# EAGLE board zx81_kbd v0.3 (EAGLE 9.6.2)
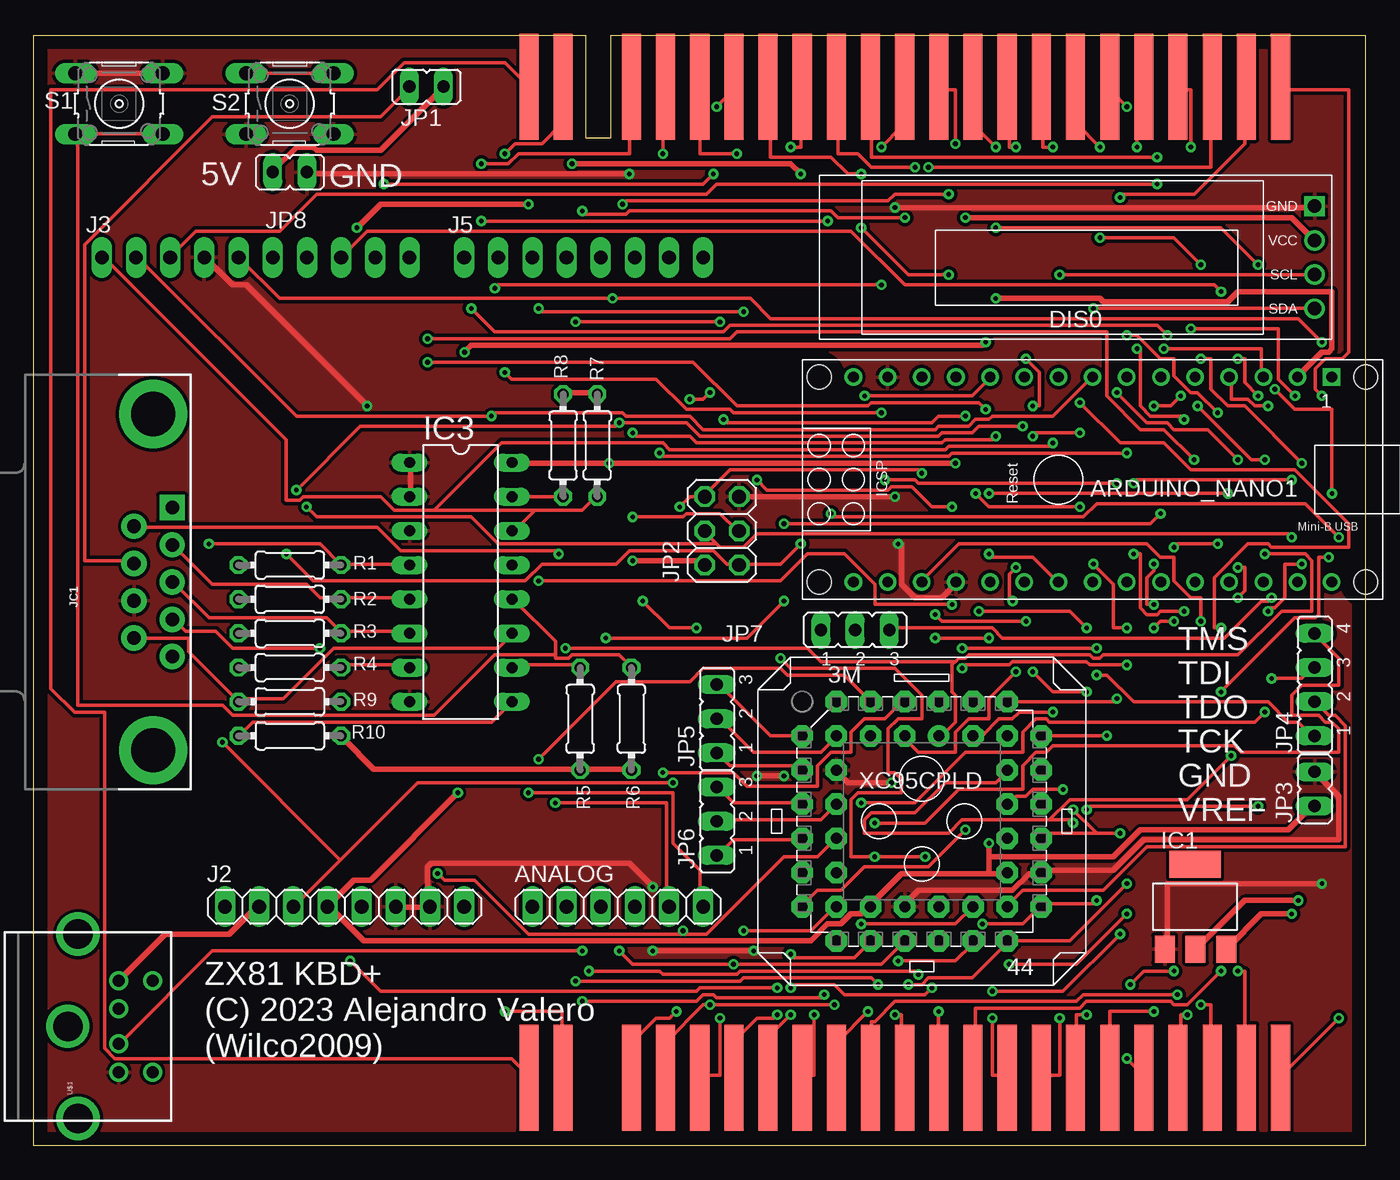
[diagram p0: board, top side]
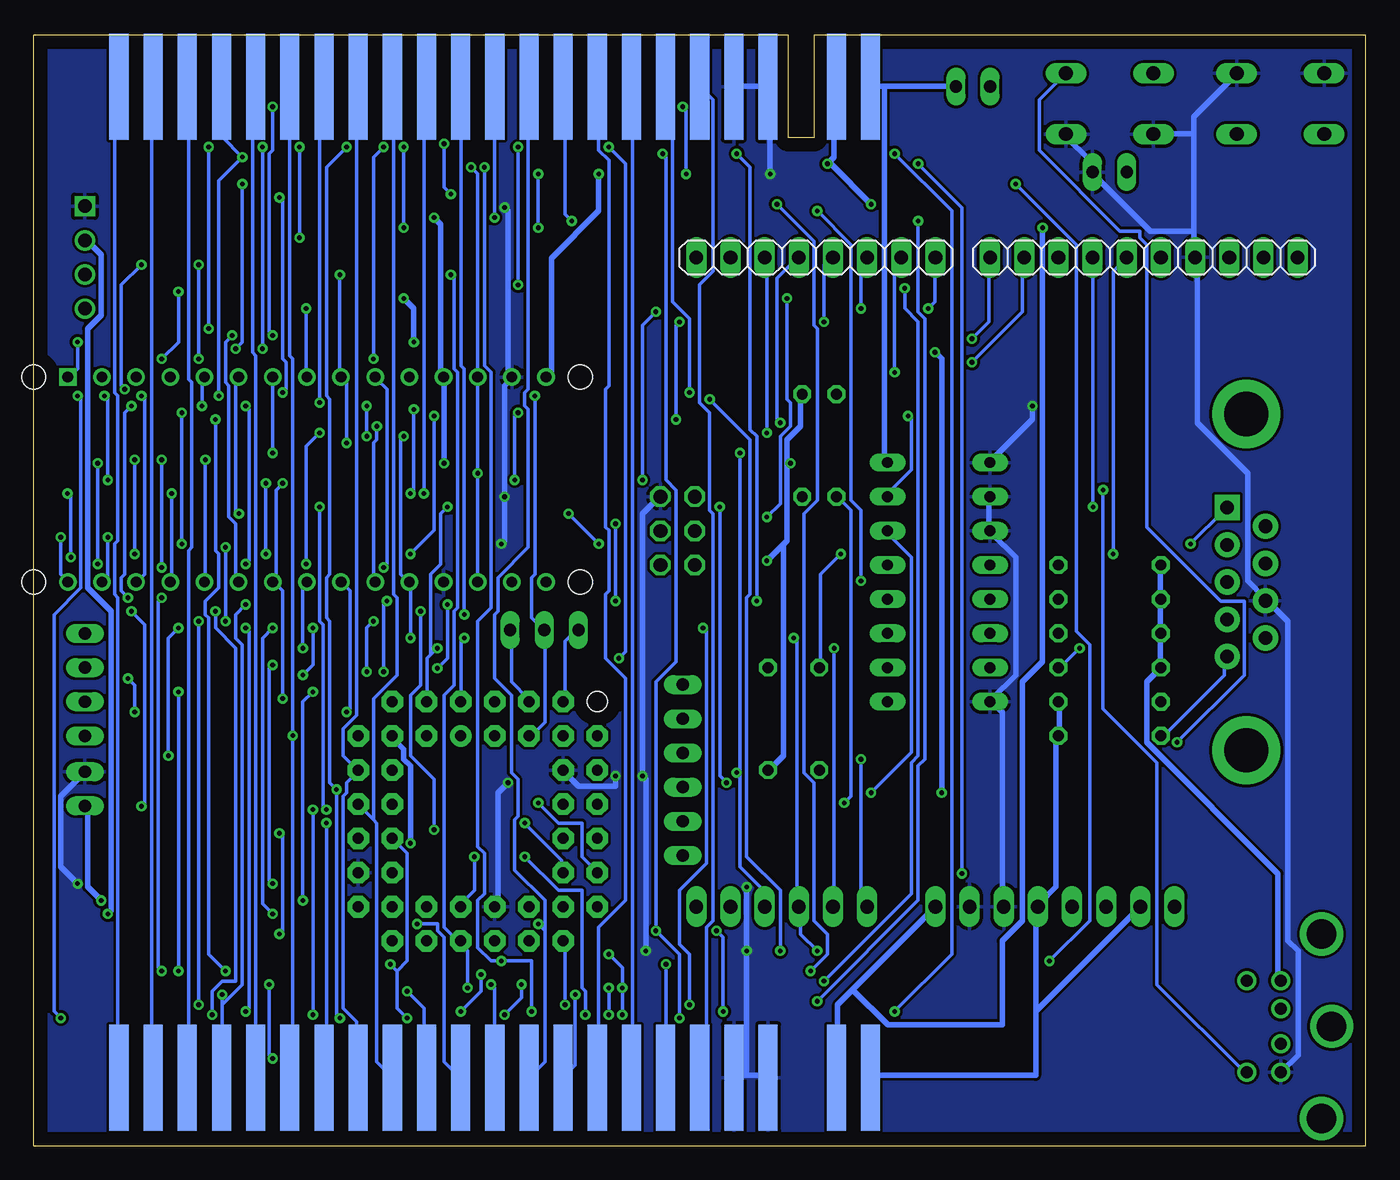
[diagram p1: board, bottom side, seen from below]

Size 99.06 x 82.55 mm. Coordinates in mm from the lower left corner, seen from the top.
Outline: 99.06,0 99.06,82.55 42.93,82.55 42.93,74.93 41.02,74.93 41.02,82.55 0,82.55 0,0 99.06,0
Copper layers (1*16): Top 0.035mm / dielectric 1.5mm / Bottom 0.035mm
Design rules "default": minimum track width 6mil, minimum drill 0.35mm, track to track 6mil, track to pad 6mil, pad to pad 6mil, via to via 6mil, smd to smd 6mil, copper to edge 40mil, drill to drill 6mil, minimum pad ring 10mil, minimum via ring 8mil, stop-mask expansion 4mil, vias tented up to drill 0mil, thermal gap 10mil
Net classes: 0 default: width 0.254 mm, drill 0.2 mm, clearance 0.127 mm; 1 VCC: width 0.4 mm

## Footprints (pad centres in the part's own frame; a part is rotated, then mirrored left to right if it is on the bottom)
EDGEPIN = smd 1.422 x 7.874: 1 0,0
1X06 = drill 1.016 long: 1 -6.35,0; 2 -3.81,0; 3 -1.27,0; 4 1.27,0; 5 3.81,0; 6 6.35,0
ARDUINO_NANO = drill 0.8 square: 1 -20.32,-7.62 | drill 0.8: 2 -17.78,-7.62; 3 -15.24,-7.62; 4 -12.7,-7.62; 5 -10.16,-7.62; 6 -7.62,-7.62; 7 -5.08,-7.62; 8 -2.54,-7.62; 9 0,-7.62; 10 2.54,-7.62; 11 5.08,-7.62; 12 7.62,-7.62; 13 10.16,-7.62; 14 12.7,-7.62; 15 15.24,-7.62; 16 15.24,7.62; 17 12.7,7.62; 18 10.16,7.62; 19 7.62,7.62; 20 5.08,7.62; 21 2.54,7.62; 22 0,7.62; 23 -2.54,7.62; 24 -5.08,7.62; 25 -7.62,7.62; 26 -10.16,7.62; 27 -12.7,7.62; 28 -15.24,7.62; 29 -17.78,7.62; 30 -20.32,7.62 | hole 1.778: -22.86,-7.62; -22.86,7.62; 17.78,7.62; 17.78,-7.62
DISPLAY-OLED-128X32 = drill 1 square: 1 -17.78,-3.81 | drill 1: 2 -17.78,-1.27; 3 -17.78,1.27; 4 -17.78,3.81
SOT223 = smd 1.499 x 2.007: 1 -2.261,-3.15; 2 0.025,-3.15; 3 2.311,-3.15 | smd 3.81 x 2.007: 4 0,3.15
DIL16 = drill 0.813 long: 1 -8.89,-3.81; 2 -6.35,-3.81; 3 -3.81,-3.81; 4 -1.27,-3.81; 5 1.27,-3.81; 6 3.81,-3.81; 7 6.35,-3.81; 8 8.89,-3.81; 9 8.89,3.81; 10 6.35,3.81; 11 3.81,3.81; 12 1.27,3.81; 13 -1.27,3.81; 14 -3.81,3.81; 15 -6.35,3.81; 16 -8.89,3.81
1X08 = drill 1.016 long: 1 -8.89,0; 2 -6.35,0; 3 -3.81,0; 4 -1.27,0; 5 1.27,0; 6 3.81,0; 7 6.35,0; 8 8.89,0
1X10 = drill 1.016 long: 1 -11.43,0; 2 -8.89,0; 3 -6.35,0; 4 -3.81,0; 5 -1.27,0; 6 1.27,0; 7 3.81,0; 8 6.35,0; 9 8.89,0; 10 11.43,0
DB9_MALE = drill 1.016 pad 1.88 square: 1 5.54,-1.42 | drill 1.016 pad 1.88: 2 2.77,-1.42; 3 0,-1.42; 4 -2.77,-1.42; 5 -5.54,-1.42; 6 4.15,1.42; 7 1.38,1.42; 8 -1.38,1.42; 9 -4.15,1.42 | drill 3.302 pad 5.08: G1 -12.5,0; G2 12.5,0
JP1 = drill 0.914 long: 1 0,-1.27; 2 0,1.27
2X03 = drill 1.016 octagon: 1 -2.54,-1.27; 2 -2.54,1.27; 3 0,-1.27; 4 0,1.27; 5 2.54,-1.27; 6 2.54,1.27
JP4 = drill 0.914 long: 1 -3.81,0; 2 -1.27,0; 3 1.27,0; 4 3.81,0
JP2 = drill 0.914 long: 1 -2.54,0; 2 0,0; 3 2.54,0
0204/7 = drill 0.813 octagon: 1 -3.81,0; 2 3.81,0
B3F-10XX_11MM = drill 1.016 long: 1 -3.251,2.261; 2 3.251,2.261; 3 -3.251,-2.261; 4 3.251,-2.261
MINI-DIN6 = drill 0.9: 1 -1.3,-8.5; 2 1.3,-8.5; 3 -3.4,-8.5; 4 3.4,-8.5; 5 -3.4,-11; 6 3.4,-11 | drill 2.2: P$1 0,-4.7; P$2 -6.858,-5.462; P$3 6.858,-5.462
3M44 = drill 0.813 pad 1.6: 1 1.27,6.35 | drill 0.813 pad 1.6 octagon: 2 -1.27,8.89; 3 -1.27,6.35; 4 -3.81,8.89; 5 -3.81,6.35; 6 -6.35,8.89; 7 -8.89,6.35; 8 -6.35,6.35; 9 -8.89,3.81; 10 -6.35,3.81; 11 -8.89,1.27; 12 -6.35,1.27; 13 -8.89,-1.27; 14 -6.35,-1.27; 15 -8.89,-3.81; 16 -6.35,-3.81; 17 -8.89,-6.35; 18 -6.35,-8.89; 19 -6.35,-6.35; 20 -3.81,-8.89; 21 -3.81,-6.35; 22 -1.27,-8.89; 23 -1.27,-6.35; 24 1.27,-8.89; 25 1.27,-6.35; 26 3.81,-8.89; 27 3.81,-6.35; 28 6.35,-8.89; 29 8.89,-6.35; 30 6.35,-6.35; 31 8.89,-3.81; 32 6.35,-3.81; 33 8.89,-1.27; 34 6.35,-1.27; 35 8.89,1.27; 36 6.35,1.27; 37 8.89,3.81; 38 6.35,3.81; 39 8.89,6.35; 40 6.35,8.89; 41 6.35,6.35; 42 3.81,8.89; 43 3.81,6.35; 44 1.27,8.89 | hole 1.499: -8.89,8.89

## Placement (x,y rotation side)
1A  D7  [EDGEPIN]  36.83,5.08 0 top
1A1  D7  [EDGEPIN]  36.83,78.74 0 top
1B  VCC  [EDGEPIN]  36.83,5.08 0 bottom
1B1  VCC  [EDGEPIN]  36.83,78.74 0 bottom
2A  /RAMCS  [EDGEPIN]  39.37,5.08 0 top
2A1  /RAMCS  [EDGEPIN]  39.37,78.74 0 top
2B  9V  [EDGEPIN]  39.37,5.08 0 bottom
2B1  9V  [EDGEPIN]  39.37,78.74 0 bottom
4A  D0  [EDGEPIN]  44.45,5.08 0 top
4A1  D0  [EDGEPIN]  44.45,78.74 0 top
4B  GND  [EDGEPIN]  44.45,5.08 0 bottom
4B1  GND  [EDGEPIN]  44.45,78.74 0 bottom
5A  D1  [EDGEPIN]  46.99,5.08 0 top
5A1  D1  [EDGEPIN]  46.99,78.74 0 top
5B  GND  [EDGEPIN]  46.99,5.08 0 bottom
5B1  GND  [EDGEPIN]  46.99,78.74 0 bottom
6A  D2  [EDGEPIN]  49.53,5.08 0 top
6A1  D2  [EDGEPIN]  49.53,78.74 0 top
6B  /CLOCK  [EDGEPIN]  49.53,5.08 0 bottom
6B1  /CLOCK  [EDGEPIN]  49.53,78.74 0 bottom
7A  D6  [EDGEPIN]  52.07,5.08 0 top
7A1  D6  [EDGEPIN]  52.07,78.74 0 top
7B  A0  [EDGEPIN]  52.07,5.08 0 bottom
7B1  A0  [EDGEPIN]  52.07,78.74 0 bottom
8A  D5  [EDGEPIN]  54.61,5.08 0 top
8A1  D5  [EDGEPIN]  54.61,78.74 0 top
8B  A1  [EDGEPIN]  54.61,5.08 0 bottom
8B1  A1  [EDGEPIN]  54.61,78.74 0 bottom
9A  D3  [EDGEPIN]  57.15,5.08 0 top
9A1  D3  [EDGEPIN]  57.15,78.74 0 top
9B  A2  [EDGEPIN]  57.15,5.08 0 bottom
9B1  A2  [EDGEPIN]  57.15,78.74 0 bottom
10A  D4  [EDGEPIN]  59.69,5.08 0 top
10A1  D4  [EDGEPIN]  59.69,78.74 0 top
10B  A3  [EDGEPIN]  59.69,5.08 0 bottom
10B1  A3  [EDGEPIN]  59.69,78.74 0 bottom
11A  A6  [EDGEPIN]  62.23,5.08 0 top
11A1  A6  [EDGEPIN]  62.23,78.74 0 top
11B  A15  [EDGEPIN]  62.23,5.08 0 bottom
11B1  A15  [EDGEPIN]  62.23,78.74 0 bottom
12A  /NMI  [EDGEPIN]  64.77,5.08 0 top
12A1  /NMI  [EDGEPIN]  64.77,78.74 0 top
12B  A14  [EDGEPIN]  64.77,5.08 0 bottom
12B1  A14  [EDGEPIN]  64.77,78.74 0 bottom
13A  /HALT  [EDGEPIN]  67.31,5.08 0 top
13A1  /HALT  [EDGEPIN]  67.31,78.74 0 top
13B  A13  [EDGEPIN]  67.31,5.08 0 bottom
13B1  A13  [EDGEPIN]  67.31,78.74 0 bottom
14A  /MREQ  [EDGEPIN]  69.85,5.08 0 top
14A1  /MREQ  [EDGEPIN]  69.85,78.74 0 top
14B  A12  [EDGEPIN]  69.85,5.08 0 bottom
14B1  A12  [EDGEPIN]  69.85,78.74 0 bottom
15A  /IORQ  [EDGEPIN]  72.39,5.08 0 top
15A1  /IORQ  [EDGEPIN]  72.39,78.74 0 top
15B  A11  [EDGEPIN]  72.39,5.08 0 bottom
15B1  A11  [EDGEPIN]  72.39,78.74 0 bottom
16A  /RD  [EDGEPIN]  74.93,5.08 0 top
16A1  /RD  [EDGEPIN]  74.93,78.74 0 top
16B  A10  [EDGEPIN]  74.93,5.08 0 bottom
16B1  A10  [EDGEPIN]  74.93,78.74 0 bottom
17A  /WR  [EDGEPIN]  77.47,5.08 0 top
17A1  /WR  [EDGEPIN]  77.47,78.74 0 top
17B  A9  [EDGEPIN]  77.47,5.08 0 bottom
17B1  A9  [EDGEPIN]  77.47,78.74 0 bottom
18A  /BUSAK  [EDGEPIN]  80.01,5.08 0 top
18A1  /BUSAK  [EDGEPIN]  80.01,78.74 0 top
18B  A8  [EDGEPIN]  80.01,5.08 0 bottom
18B1  A8  [EDGEPIN]  80.01,78.74 0 bottom
19A  /WAIT  [EDGEPIN]  82.55,5.08 0 top
19A1  /WAIT  [EDGEPIN]  82.55,78.74 0 top
19B  A7  [EDGEPIN]  82.55,5.08 0 bottom
19B1  A7  [EDGEPIN]  82.55,78.74 0 bottom
20A  /BUSRQ  [EDGEPIN]  85.09,5.08 0 top
20A1  /BUSRQ  [EDGEPIN]  85.09,78.74 0 top
20B  A6  [EDGEPIN]  85.09,5.08 0 bottom
20B1  A6  [EDGEPIN]  85.09,78.74 0 bottom
21A  /RESET  [EDGEPIN]  87.63,5.08 0 top
21A1  /RESET  [EDGEPIN]  87.63,78.74 0 top
21B  A5  [EDGEPIN]  87.63,5.08 0 bottom
21B1  A5  [EDGEPIN]  87.63,78.74 0 bottom
22A  /M1  [EDGEPIN]  90.17,5.08 0 top
22A1  /M1  [EDGEPIN]  90.17,78.74 0 top
22B  A4  [EDGEPIN]  90.17,5.08 0 bottom
22B1  A4  [EDGEPIN]  90.17,78.74 0 bottom
23A  /RFSH  [EDGEPIN]  92.71,5.08 0 top
23A1  /RFSH  [EDGEPIN]  92.71,78.74 0 top
23B  /ROMCS  [EDGEPIN]  92.71,5.08 0 bottom
23B1  /ROMCS  [EDGEPIN]  92.71,78.74 0 bottom
ANALOG  [1X06]  43.43,17.78 0 top
ARDUINO_NANO1  [ARDUINO_NANO]  76.2,49.53 180 top
DIS0  DISPLAY-OLED-128X32  [DISPLAY-OLED-128X32]  77.47,66.04 180 top
IC1  REG1117  [SOT223]  86.36,17.78 0 top
IC3  PCF8574P  [DIL16]  31.75,41.91 270 top
J2  [1X08]  23.11,17.78 0 top
J3  [1X10]  16.51,66.04 0 bottom
J5  [1X08]  40.89,66.04 0 bottom
JC1  ATARI JOYSTICK  [DB9_MALE]  8.89,41.91 90 top
JP1  Vcc JOYSTICK  [JP1]  29.21,78.74 90 top
JP2  [2X03]  51.18,45.72 90 top
JP3  VREF  [JP1]  95.25,26.54 0 top
JP4  JTAG  [JP4]  95.25,34.29 90 top
JP5  [JP2]  50.8,31.75 90 top
JP6  [JP2]  50.8,24.13 90 top
JP7  [JP2]  61.09,38.35 0 top
JP8  POWER  [JP1]  19.05,72.39 90 top
R1  4k7  [0204/7]  19.05,43.18 0 top
R2  4k7  [0204/7]  19.05,40.64 0 top
R3  4k7  [0204/7]  19.05,38.1 0 top
R4  4k7  [0204/7]  19.05,35.56 0 top
R5  4k7  [0204/7]  40.64,31.75 90 top
R6  4k7  [0204/7]  44.45,31.75 90 top
R7  100K  [0204/7]  41.91,52.07 90 top
R8  100K  [0204/7]  39.37,52.07 90 top
R9  4k7  [0204/7]  19.05,33.02 180 top
R10  4k7  [0204/7]  19.05,30.48 180 top
S1  STORE  [B3F-10XX_11MM]  6.35,77.47 0 top
S2  RESET  [B3F-10XX_11MM]  19.05,77.47 0 top
U$1  MINI-DIN6PTH  [MINI-DIN6]  -2.16,8.89 90 top
XC95CPLD  XC9572PLC  [3M44]  66.04,24.13 0 top

## Library data of the parts
1A 1A1 1B 1B1 2A 2A1 2B 2B1 4A 4A1 4B 4B1 5A 5A1 5B 5B1 6A 6A1 6B 6B1 7A 7A1 7B 7B1 8A 8A1 8B 8B1 9A 9A1 9B 9B1 10A 10A1 10B 10B1 11A 11A1 11B 11B1 12A 12A1 12B 12B1 13A 13A1 13B 13B1 14A 14A1 14B 14B1 15A 15A1 15B 15B1 16A 16A1 16B 16B1 17A 17A1 17B 17B1 18A 18A1 18B 18B1 19A 19A1 19B 19B1 20A 20A1 20B 20B1 21A 21A1 21B 21B1 22A 22A1 22B 22B1 23A 23A1 23B 23B1 = wirepad
ANALOG J2 J3 J5 JP2 = pinhead
ARDUINO_NANO1 = ArduinoNanoV30
DIS0 = diy-modules
IC1 = burr-brown; MPN: REG1117
IC3 = micro-philips; MPN: PCF8574PN; OC_FARNELL: 204020; OC_NEWARK: 11N8515
JC1 = SparkFun-Connectors; PROD_ID: CONN-09904
JP1 JP3-JP8 = jumper
R1-R10 = rcl; SPICEPREFIX: R
S1 S2 = switch-omron
U$1 = SparkFun-Retired
XC95CPLD = xilinx_9

## Nets
3V3 [VCC]: ARDUINO_NANO1.2 IC1.2 J2.4 JP3.1 XC95CPLD.21 XC95CPLD.32 XC95CPLD.41
9V [VCC]: 2B1.1 2B.1 ARDUINO_NANO1.15 J2.8
/BUSAK: 18A1.1 18A.1
/BUSRQ: 20A1.1 20A.1
/CLOCK: 6B1.1 6B.1
/HALT: 13A1.1 13A.1
/IORQ: 15A1.1 15A.1 XC95CPLD.34
/M1: 22A1.1 22A.1
/MREQ: 14A1.1 14A.1
/NMI: 12A1.1 12A.1
/RAMCS: 2A1.1 2A.1
/RD: 16A1.1 16A.1 XC95CPLD.36
/RESET: 21A1.1 21A.1 ARDUINO_NANO1.13 ARDUINO_NANO1.18 J2.3 JP2.6 S2.1 S2.2
/RFSH: 23A1.1 23A.1
/ROMCS: 23B1.1 23B.1
/WAIT: 19A1.1 19A.1
/WR: 17A1.1 17A.1
A0: 7B1.1 7B.1 XC95CPLD.22
A1: 8B1.1 8B.1
A2: 9B1.1 9B.1
A3: 10B1.1 10B.1
A4: 22B1.1 22B.1
A5: 21B1.1 21B.1
A6: 11A1.1 11A.1 20B1.1 20B.1
A7: 19B1.1 19B.1
A8: 18B1.1 18B.1 XC95CPLD.39
A9: 17B1.1 17B.1 XC95CPLD.38
A10: 16B1.1 16B.1 XC95CPLD.37
A11: 15B1.1 15B.1 XC95CPLD.35
A12: 14B1.1 14B.1 XC95CPLD.33
A13: 13B1.1 13B.1 XC95CPLD.29
A14: 12B1.1 12B.1 XC95CPLD.28
A15: 11B1.1 11B.1 XC95CPLD.27
AREF: ARDUINO_NANO1.3 J3.8
C0: ANALOG.2 ARDUINO_NANO1.5 XC95CPLD.1
C1: ARDUINO_NANO1.20 J5.3 XC95CPLD.44
C2: ARDUINO_NANO1.22 J5.5 XC95CPLD.43
C3: ARDUINO_NANO1.23 J5.6 XC95CPLD.42
C4: ARDUINO_NANO1.24 J5.7 XC95CPLD.40
CLK: ANALOG.4 ARDUINO_NANO1.7 XC95CPLD.2
D0: 4A1.1 4A.1 XC95CPLD.14
D1: 5A1.1 5A.1 XC95CPLD.18
D2: 6A1.1 6A.1 XC95CPLD.19
D3: 9A1.1 9A.1 XC95CPLD.25
D4: 10A1.1 10A.1 XC95CPLD.26
D5: 8A1.1 8A.1 XC95CPLD.24
D6: 7A1.1 7A.1 XC95CPLD.20
D7: 1A1.1 1A.1
GND [VCC]: 4B1.1 4B.1 5B1.1 5B.1 ARDUINO_NANO1.14 ARDUINO_NANO1.19 DIS0.1 IC1.1 IC3.1 IC3.2 IC3.3 IC3.8 J2.6 J2.7 J3.7 JC1.8 JP2.5 JP3.2 JP8.1 S1.1 S1.2 S2.3 S2.4 U$1.3 XC95CPLD.10 XC95CPLD.23 XC95CPLD.31
GPX: ARDUINO_NANO1.26 J3.1
INT: ARDUINO_NANO1.27 J3.2
MISO: ARDUINO_NANO1.30 J3.5 JP2.1
MOSI: ARDUINO_NANO1.29 J3.4 JP2.4
N$1: JP6.3 XC95CPLD.11
N$2: JP6.2 XC95CPLD.12
N$3: JP6.1 XC95CPLD.13
N$29: IC3.4 JC1.1 R1.2
N$32: IC3.5 JC1.2 R2.2
N$33: IC3.6 JC1.3 R3.2
N$34: IC3.7 JC1.4 R4.2
N$35: IC3.10 JC1.6 R5.2
N$36: IC3.9 JC1.5 R10.2
N$37: IC3.12 R6.2 S1.3 S1.4
N$38: JC1.7 JP1.2
N$39: IC3.11 JC1.9 R9.2
NRST: ARDUINO_NANO1.10 XC95CPLD.3
PS2CLK: ARDUINO_NANO1.21 J5.4 U$1.5
PS2DATA: ANALOG.3 ARDUINO_NANO1.6 U$1.1
RES: ARDUINO_NANO1.25 J5.8
RX: J5.1
SCK: ARDUINO_NANO1.1 J3.6 JP2.3
SCL: ANALOG.6 ARDUINO_NANO1.9 DIS0.3 IC3.14 J3.10 R7.1
SDA: ANALOG.5 ARDUINO_NANO1.8 DIS0.4 IC3.15 J3.9 R8.1
SPARE1: ANALOG.1 ARDUINO_NANO1.4 JP7.3 XC95CPLD.4
SPARE2: ARDUINO_NANO1.11 JP7.2 XC95CPLD.5
SPARE3: JP7.1 XC95CPLD.6
SPARE4: JP5.3 XC95CPLD.7
SPARE5: JP5.2 XC95CPLD.8
SPARE6: JP5.1 XC95CPLD.9
SS: ARDUINO_NANO1.28 J3.3
TCK: JP4.1 XC95CPLD.17
TDI: JP4.3 XC95CPLD.15
TDO: JP4.2 XC95CPLD.30
TMS: JP4.4 XC95CPLD.16
TX: J5.2
VCC [VCC]: 1B1.1 1B.1 ARDUINO_NANO1.12 DIS0.2 IC1.3 IC3.16 J2.2 J2.5 JP1.1 JP2.2 JP8.2 R1.1 R2.1 R3.1 R4.1 R5.1 R6.1 R7.2 R8.2 R9.1 R10.1 U$1.4

## Tracks (layer width: path | path; a pad name or v marks a point on that pad's centre or on a via)
3V3  (via drill 0.35)
  Top 0.4: v94.04,18.25 90.04,18.25 86.54,14.75 IC1.2 | 71.04,20.25 72.29,20.25 XC95CPLD.32 | 71.04,20.25 64.54,20.25 62.29,18 XC95CPLD.21 62.04,17.75 61.54,17.25 60.79,17.25 60.04,16.5 59.04,16.5 57.79,15.25 24.54,15.25 22.04,17.75 J2.4 22.04,18 23.79,19.75 25.04,19.75 v31.54,26.25 | 71.04,20.25 71.04,21.5 | 71.04,21.5 v71.04,22.5 | 71.04,21.5 80.29,21.5 82.29,23.5 93.29,23.5 95.04,25.25 JP3.1 | v71.54,63 79.29,63 79.54,62.75 88.79,62.75 89.54,63.5 96.54,63.5 96.54,59.25 96.29,59 95.79,59 94.04,57.25 ARDUINO_NANO1.2 | v70.79,59.75 70.54,59.5 32.54,59.5 v32.04,59
  Bottom 0.4: v94.04,18.25 95.04,19.25 95.04,25.25 JP3.1 | v71.04,22.5 71.04,28.25 71.54,28.75 71.54,29.5 72.29,30.25 XC95CPLD.41 | v71.54,63 70.79,62.25 v70.79,59.75 | v32.04,59 31.54,58.5 v31.54,26.25
9V  (via drill 0.35)
  Top 0.4: v57.04,72.25 56.29,73 v40.04,73 | v24.04,68.25 25.79,70 v36.79,70
  Bottom 0.4: 38.16,11.62 39.29,10.5 39.29,5.25 2B.1 | 38.16,11.62 32.04,17.75 J2.8 | v57.04,72.25 57.04,69.5 60.54,66 60.54,57.5 60.79,57.25 ARDUINO_NANO1.15 | 2B1.1 39.54,78.5 39.54,73.5 v40.04,73 39.79,73 v36.79,70 | 38.16,11.62 35.54,9 27.04,9 27.04,15.25 25.54,16.75 25.54,34.5 24.04,36 v24.04,68.25
/BUSAK  (via drill 0.35)
  Top 0.254: v83.29,10 80.04,10 80.04,5.25 18A.1 | v83.29,38.5 83.79,39 v84.79,39 | v84.79,44.5 85.04,44.75 v88.04,44.75 | v88.04,54.5 86.54,56 86.04,56 84.79,57.25 84.79,58.5 83.79,58.5 82.04,60.25 v81.29,60.25 | v81.29,77.25 80.04,78.5 18A1.1
  Bottom 0.254: v83.29,10 83.04,10.25 83.04,38.25 v83.29,38.5 | v84.79,44.5 v84.79,39 | v88.04,54.5 v88.04,44.75 | v81.29,60.25 81.54,60.5 81.54,73.75 81.29,74 v81.29,77.25
/BUSRQ  (via drill 0.35)
  Top 0.254: v85.79,9.75 85.29,9.75 85.29,5.25 20A.1 | v85.54,39.75 83.79,39.75 83.54,39.5 82.79,39.5 82.29,40 82.29,44 v81.79,44 | v81.79,49.25 82.04,49.5 v93.54,49.5 | v93.79,55.75 92.54,57 92.54,60.75 v86.04,60.75 | v86.04,74.25 86.04,78.5 85.29,78.5 20A1.1
  Bottom 0.254: v85.79,9.75 85.79,11.5 85.04,12.25 84.04,12.25 84.04,37 85.54,38.5 v85.54,39.75 | v81.79,49.25 v81.79,44 | v93.54,49.5 93.54,55.5 v93.79,55.75 | v86.04,74.25 v86.04,60.75
/CLOCK
  Bottom 0.254: 6B1.1 48.54,77.75 48.54,65 49.54,64 49.54,55.25 48.79,54.5 48.79,47.25 48.54,47 48.54,16.75 49.04,16.25 49.04,5.5 49.29,5.25 6B.1
/HALT  (via drill 0.35)
  Top 0.254: v67.29,10 67.29,5.25 13A.1 | v65.79,12.75 65.54,13 52.54,13 52.29,12.75 46.79,12.75 46.54,13 v41.29,13 | v43.79,70 44.04,70.25 63.54,70.25 64.04,70.75 v68.04,70.75 | v68.54,74.5 68.54,78.5 67.54,78.5 13A1.1
  Bottom 0.254: v67.29,10 65.79,11.5 v65.79,12.75 | v41.29,13 40.04,14.25 40.04,15.75 41.04,16.75 41.04,27 41.79,27.75 41.79,47 40.79,48 40.79,60.75 41.04,61 41.04,67.25 v43.79,70 | v68.04,70.75 68.54,71.25 v68.54,74.5
/IORQ  (via drill 0.35)
  Top 0.254: v71.29,9.5 71.29,5.25 72.29,5.25 15A.1 | v73.04,74.25 72.54,74.25 72.54,78.5 15A1.1 | v73.79,58.5 74.79,57.5 74.79,55 v74.29,55 | v74.29,52.75 74.54,53 v77.79,53 | v78.79,43.25 80.29,41.75 80.29,38.5 v81.29,38.5 | v81.29,17.25 77.54,13.5 v72.54,13.5
  Bottom 0.254: 72.04,13 71.29,13.75 71.29,21.75 72.29,22.75 XC95CPLD.34 | 72.04,13 72.04,10.25 v71.29,9.5 | v73.04,74.25 73.79,73.5 v73.79,58.5 | v74.29,52.75 v74.29,55 | v77.79,53 78.79,52 v78.79,43.25 | v81.29,38.5 82.04,37.75 82.04,18 v81.29,17.25 | 72.04,13 v72.54,13.5
/M1  (via drill 0.35)
  Top 0.254: v89.54,13 90.04,13 90.04,5.25 22A.1 | v89.54,40.75 90.04,41.25 90.04,43 v89.54,43 | v89.54,51 87.29,53.25 84.79,53.25 84.29,53.75 82.79,53.75 v80.54,56 | v80.79,70.5 81.04,70.75 86.29,70.75 90.04,74.5 90.04,78.5 22A1.1
  Bottom 0.254: v89.54,13 89.79,13.25 89.79,40.5 v89.54,40.75 | v89.54,51 v89.54,43 | v80.54,56 80.29,56.25 80.29,58.25 80.54,58.5 80.54,70.25 v80.79,70.5
/MREQ  (via drill 0.35)
  Top 0.254: v88.29,13 85.79,10.5 84.79,10.5 84.54,10.75 78.29,10.75 77.79,10.25 70.04,10.25 70.04,5.25 14A.1 | v88.29,33.75 93.79,39.25 95.29,39.25 95.54,39.5 95.54,43.75 v96.29,43.75 | v96.54,48.5 96.54,54.75 93.79,54.75 v92.29,56.25 | v91.04,65.5 88.29,68.25 v71.54,68.25 | v71.54,74.25 70.04,75.75 70.04,78.5 14A1.1
  Bottom 0.254: v88.29,33.75 v88.29,13 | v96.29,43.75 96.29,48.25 v96.54,48.5 | v92.29,56.25 92.54,56.5 92.54,64 v91.04,65.5 | v71.54,74.25 v71.54,68.25
/NMI  (via drill 0.35)
  Top 0.254: v64.04,9.75 64.54,9.75 64.54,5.25 12A.1 | v62.79,12 62.29,12.5 52.79,12.5 52.54,12.25 v40.29,12.25 | v34.29,63.75 34.54,64 v63.04,64 | v63.04,74.25 64.54,75.75 64.54,78.5 12A1.1
  Bottom 0.254: v64.04,9.75 62.79,11 v62.79,12 | v40.29,12.25 33.79,18.75 33.79,28.5 33.29,29 33.29,61.25 34.29,62.25 v34.29,63.75 | v63.04,74.25 v63.04,64
/RAMCS  (via drill 0.35)
  Top 0.254: v35.04,10 39.29,10 39.29,5.25 2A.1 | v35.04,73.75 35.79,74.5 37.79,74.5 39.29,76 39.29,78.5 2A1.1
  Bottom 0.254: v35.04,10 30.79,14.25 30.79,69.5 v35.04,73.75
/RD  (via drill 0.35)
  Top 0.254: v76.54,26.5 74.29,26.5 73.79,26 73.04,26 72.54,25.5 XC95CPLD.36 | v76.29,9.5 76.29,5.25 75.04,5.25 16A.1 | v75.79,74.25 75.04,74.25 75.04,78.5 16A1.1
  Bottom 0.254: v76.29,9.5 76.54,9.75 v76.54,26.5 77.04,27 77.04,39 77.29,39.25 77.29,42.25 77.04,42.5 77.04,55.5 77.29,55.75 77.29,72.75 v75.79,74.25
/RESET  (via drill 0.35)
  Top 0.254: 22.79,21.25 28.54,27 v47.54,27 | 22.79,21.25 19.54,18 J2.3 | v48.04,47.5 48.79,48.25 49.79,48.25 JP2.6 50.04,48.5 51.79,50.25 65.79,50.25 v66.04,50 | v86.79,10.5 87.54,10.5 87.54,5.25 21A.1 | v86.79,39 86.79,40.75 86.04,40.75 84.79,42 84.79,43.75 83.79,43.75 82.79,44.75 68.79,44.75 66.04,42 ARDUINO_NANO1.18 | v66.54,72.75 87.54,72.75 87.54,78.5 21A1.1 | S2.1 16.04,79.75 22.29,79.75 S2.2 | 22.79,21.25 v14.04,30
  Bottom 0.254: ARDUINO_NANO1.18 v66.04,50 ARDUINO_NANO1.13 66.04,72.25 v66.54,72.75 | v47.54,27 48.04,27.5 v48.04,47.5 | v86.79,39 v86.79,10.5 | v14.04,30 9.04,35 9.04,40.5 10.79,40.5 16.29,46 16.29,67 16.79,67.5 16.79,68 18.29,68 24.29,74 24.29,77.75 22.54,79.5 S2.2
/RFSH  (via drill 0.35)
  Top 0.254: v97.04,9.5 92.79,5.25 23A.1 | v95.79,55.75 95.29,56.25 95.29,57.75 96.04,58.5 97.29,58.5 97.79,59 97.79,78.5 92.79,78.5 23A1.1
  Bottom 0.254: v97.04,9.5 97.54,10 97.54,39.5 95.54,41.5 95.54,55.5 v95.79,55.75
/ROMCS
  Bottom 0.254: 23B.1 92.79,5.25 92.79,40.75 93.04,41 93.04,44.75 92.79,45 92.79,55.75 93.04,56 93.04,78.25 92.79,78.5 23B1.1
/WAIT  (via drill 0.35)
  Top 0.254: v81.29,6.5 82.54,5.25 19A.1 | v81.54,12 82.54,13 v84.79,13 | v85.54,54 85.29,54.25 83.04,54.25 82.29,55 82.29,59.25 v82.04,59.25 | v82.04,74.25 82.04,78.5 82.54,78.5 19A1.1
  Bottom 0.254: v81.29,6.5 81.54,6.75 v81.54,12 | v84.79,13 86.04,14.25 86.04,39.25 86.29,39.5 86.29,40.5 85.29,41.5 85.29,44 85.54,44.25 v85.54,54 | v82.04,74.25 v82.04,59.25
/WR  (via drill 0.35)
  Top 0.254: v78.29,9.75 77.54,9.75 77.54,5.25 17A.1 | v78.29,25 78.54,25.25 v91.04,25.25 | v91.79,39.75 92.04,40 92.29,40 93.04,40.75 93.04,43.25 v94.29,43.25 | v94.29,50.75 90.04,55 88.79,55 87.54,56.25 87.54,58.5 v86.79,58.5 | v86.79,65.5 84.79,67.5 v79.29,67.5 | v79.29,74.25 77.54,76 77.54,78.5 17A1.1
  Bottom 0.254: v78.29,25 v78.29,9.75 | v91.04,25.25 90.79,25.5 90.79,38.75 v91.79,39.75 | v94.29,50.75 v94.29,43.25 | v86.79,65.5 v86.79,58.5 | v79.29,74.25 v79.29,67.5
A0  (via drill 0.35)
  Top 0.254: XC95CPLD.22 64.54,15 63.04,13.5 v52.04,13.5 44.54,13.5 v43.54,14.5 | v50.29,56 49.79,55.5 v48.79,55.5
  Bottom 0.254: v52.04,13.5 52.04,5.25 7B.1 | v50.29,56 50.29,61.5 51.54,62.75 51.54,78 52.04,78.5 7B1.1 | v48.79,55.5 45.79,52.5 45.79,41 46.04,40.75 46.04,21.5 43.54,19 v43.54,14.5
A1
  Bottom 0.254: 8B.1 54.54,5.25 54.54,78.5 8B1.1
A2
  Bottom 0.254: 9B.1 57.04,5.25 57.04,16.25 55.04,18.25 55.04,34.75 56.54,36.25 56.54,41 56.29,41.25 56.29,45.75 56.54,46 56.54,56.25 56.29,56.5 56.29,73.25 57.04,74 57.04,78.5 9B1.1
A3  (via drill 0.35)
  Top 0.254: v58.79,11.25 58.54,11 50.79,11 50.54,11.25 49.79,11.25 49.29,10.75 v40.79,10.75 | v59.04,68.75 v33.29,68.75
  Bottom 0.254: v58.79,11.25 58.79,6 59.54,5.25 10B.1 | v40.79,10.75 33.29,18.25 33.29,28.25 32.79,28.75 32.79,61.5 33.29,62 v33.29,68.75 | v59.04,68.75 59.54,69.25 59.54,78.5 10B1.1
A4
  Bottom 0.254: 22B.1 90.29,5.25 90.29,78.5 22B1.1
A5
  Bottom 0.254: 21B.1 87.54,5.25 87.54,44.25 87.29,44.5 87.29,56.75 87.54,57 87.54,78.5 21B1.1
A6  (via drill 0.35)
  Top 0.254: v83.54,73.5 62.29,73.5 62.29,78.5 11A1.1 | v85.04,11.25 78.04,11.25 77.54,10.75 64.04,10.75 62.54,9.25 62.29,9.25 62.29,5.25 11A.1 | v85.29,55.75 84.54,55 v83.29,55 | v83.29,43.25 83.29,42.75 82.79,42.25 82.79,40.25 v83.29,40.25
  Bottom 0.254: 20B1.1 85.04,78.5 85.04,75 v83.54,73.5 85.29,71.75 v85.29,55.75 | 85.04,10.5 85.04,5.25 20B.1 | 85.04,10.5 v85.04,11.25 | v83.29,55 83.04,54.75 83.04,43.5 v83.29,43.25 | v83.29,40.25 84.04,39.5 84.04,37.75 83.54,37.25 83.54,12 85.04,10.5
A7
  Bottom 0.254: 19B.1 82.54,5.25 82.54,58.75 82.79,59 82.79,78.5 19B1.1
A8  (via drill 0.35)
  Top 0.254: v79.79,30.5 75.04,30.5 XC95CPLD.39
  Bottom 0.254: 18B.1 79.79,5.25 v79.79,30.5 79.79,58.5 80.04,58.75 80.04,78.5 18B1.1
A9  (via drill 0.35)
  Top 0.254: 75.54,24.25 77.04,24.25 v77.29,24 | 75.54,24.25 69.04,24.25 68.04,23.25 61.79,23.25 61.79,24.25 62.29,24.75 65.54,24.75 67.79,27 71.54,27 72.29,27.75 XC95CPLD.38 | v77.79,55.25 80.79,52.25 84.04,52.25 86.04,50.25 93.79,50.25 97.79,46.25 97.79,44.5 92.04,44.5 91.79,44.75 90.29,44.75 87.79,42.25 87.79,38.5 v88.29,38.5 | v89.04,29 85.79,25.75 77.04,25.75 75.54,24.25
  Bottom 0.254: v77.29,24 77.29,5.25 17B.1 | v77.79,55.25 77.79,78.25 77.54,78.5 17B1.1 | v88.29,38.5 89.04,37.75 v89.04,29
A10
  Bottom 0.254: 16B.1 75.04,5.25 75.04,9.25 76.04,10.25 76.04,26 75.79,26.25 75.79,27 75.04,27.75 XC95CPLD.37 75.04,28 76.04,29 76.04,31 75.04,32 75.04,78.5 16B1.1
A11
  Bottom 0.254: 73.79,24.25 73.54,24 73.54,6.25 72.54,5.25 15B.1 | 73.79,24.25 74.79,25.25 XC95CPLD.35 | 73.79,24.25 73.79,33.25 72.04,35 72.04,40.75 72.29,41 72.29,78.5 15B1.1
A12  (via drill 0.35)
  Top 0.254: v80.79,23.25 79.04,23.25 | 79.04,23.25 75.29,23.25 75.04,23 XC95CPLD.33 | v80.79,15.75 76.54,11.5 v71.29,11.5 | v70.04,48.5 71.04,47.5 v77.79,47.5 | 79.04,23.25 v77.29,25
  Bottom 0.254: v80.79,23.25 80.54,23 80.54,16 v80.79,15.75 | v71.29,11.5 70.04,10.25 70.04,5.25 14B.1 | v70.04,48.5 70.04,78.5 14B1.1 | v77.79,47.5 77.79,39 77.54,38.75 77.54,25.25 v77.29,25
A13  (via drill 0.35)
  Top 0.254: v70.54,16.5 73.54,16.5 74.79,17.75 XC95CPLD.29 75.04,18 78.79,18 v79.04,18.25 | v67.04,39.5 67.54,39 v73.79,39 | v74.29,35.25 75.79,33.75 v78.29,33.75
  Bottom 0.254: v70.54,16.5 69.04,16.5 69.04,16 68.54,15.5 68.54,6.25 67.54,5.25 13B.1 | v67.04,39.5 67.04,57.75 67.29,58 67.29,78.5 13B1.1 | v73.79,39 74.29,38.5 v74.29,35.25 | v78.29,33.75 79.04,33 v79.04,18.25
A14  (via drill 0.35)
  Top 0.254: v65.04,12 66.04,12 66.54,12.5 69.79,12.5 72.29,15 XC95CPLD.28 72.54,15.25 77.04,15.25 v81.29,19.5 | v64.79,69 59.79,69 59.29,69.5 44.29,69.5 44.04,69.25 41.04,69.25 v40.79,69.5 | v37.54,42 55.54,42 57.54,44 60.29,44 62.54,41.75 62.54,40.25 v68.29,40.25 | v69.04,35.5 69.29,35.75 72.54,35.75 72.79,36 78.29,36 78.54,35.75 v81.29,35.75
  Bottom 0.254: v65.04,12 64.79,11.75 64.79,5.25 12B.1 | v64.79,69 64.79,78.5 12B1.1 | v40.79,69.5 38.29,67 38.29,48 37.54,47.25 v37.54,42 | v68.29,40.25 68.29,36.25 v69.04,35.5 | v81.29,35.75 81.54,35.5 81.54,19.75 v81.29,19.5
A15  (via drill 0.35)
  Top 0.254: v61.54,16.5 68.54,16.5 69.79,17.75 XC95CPLD.27
  Bottom 0.254: 61.04,16 v61.54,16.5 | 61.04,16 61.04,6.25 62.04,5.25 11B.1 | 61.04,16 61.04,18.25 63.29,20.5 63.29,24.25 63.04,24.5 63.04,27.25 63.54,27.75 63.54,33.5 64.79,34.75 64.79,39.5 64.54,39.75 64.54,42.25 62.29,44.5 62.29,54.75 62.54,55 62.54,56 62.29,56.25 62.29,78.5 11B1.1
AREF  (via drill 0.35)
  Top 0.254: v84.04,59.25 91.29,59.25 91.29,57.25 ARDUINO_NANO1.3 | v83.54,71.5 50.79,71.5 50.04,70.75 21.04,70.75 18.29,68 12.04,68 10.29,66.25 J3.8
  Bottom 0.254: v84.04,59.25 83.54,59.75 v83.54,71.5
C0  (via drill 0.35)
  Top 0.254: v86.54,55 90.54,51 v91.54,51 | v91.54,44 94.54,44 95.04,43.5 95.04,39.75 92.79,39.75 89.54,36.5 79.54,36.5 79.29,36.25 78.79,36.25 78.54,36.5 69.54,36.5 69.29,36.25 68.79,36.25 68.54,36 | 68.54,36 68.29,35.75 68.29,33.75 68.54,33.5 68.54,31.5 67.54,30.5 XC95CPLD.1 | v39.54,37 57.54,37 58.54,36 68.54,36
  Bottom 0.254: v86.54,55 86.54,57 ARDUINO_NANO1.5 | v91.54,44 v91.54,51 | v39.54,37 39.54,18 ANALOG.2
C1  (via drill 0.35)
  Top 0.254: v67.04,37.75 v71.04,37.75 | v44.54,53 44.79,52.75 48.79,52.75 49.29,52.25 67.54,52.25 67.79,52.5 71.29,52.5 v71.54,52.75
  Bottom 0.254: v71.04,37.75 71.04,41.75 ARDUINO_NANO1.20 71.29,42 71.79,42.5 71.79,52.5 v71.54,52.75 | v67.04,37.75 67.29,37.5 67.29,33.25 XC95CPLD.44 | v44.54,53 44.54,66 J5.3
C2  (via drill 0.35)
  Top 0.254: v75.79,32.25 73.29,32.25 72.79,31.75 71.79,31.75 70.54,30.5 70.04,30.5 XC95CPLD.43 | v51.04,61.25 v40.29,61.25 | v51.29,54 51.54,53.75 66.79,53.75 67.29,54.25 v69.29,54.25 | v71.04,44 71.29,43.75 74.29,43.75 76.04,42 ARDUINO_NANO1.22
  Bottom 0.254: ARDUINO_NANO1.22 75.54,41.25 75.54,32.5 v75.79,32.25 | v40.29,61.25 40.29,65.5 39.79,66 J5.5 | v51.04,61.25 51.29,61 v51.29,54 | v69.29,54.25 69.29,45.75 v71.04,44
C3  (via drill 0.35)
  Top 0.254: v69.04,37 v79.04,37 | v37.54,62.25 37.79,62 v52.79,62 | v53.79,49.5 54.54,48.75 63.54,48.75 63.79,49 65.29,49 66.79,47.5 v68.29,47.5
  Bottom 0.254: v79.04,37 79.04,41.5 78.79,41.75 ARDUINO_NANO1.23 | 69.54,36.5 69.79,36.25 69.79,33.25 XC95CPLD.42 | 69.54,36.5 v69.04,37 | v37.54,62.25 37.54,65.75 37.29,66 J5.6 | v52.79,62 53.79,61 v53.79,49.5 | v68.29,47.5 68.79,47 68.79,43.25 69.54,42.5 69.54,36.5
C4  (via drill 0.35)
  Top 0.254: v80.54,33.25 80.29,33 72.54,33 XC95CPLD.40 | v35.04,57.5 35.54,57 46.29,57 48.54,54.75 51.79,54.75 52.04,54.5 v63.04,54.5 | v63.29,49.5 65.54,49.5 65.79,49.25 v80.54,49.25
  Bottom 0.254: v80.54,33.25 80.54,41.25 81.04,41.75 ARDUINO_NANO1.24 81.04,42 81.04,48.75 v80.54,49.25 | v35.04,57.5 35.04,65.75 34.79,66 J5.7 | v63.04,54.5 63.29,54.25 v63.29,49.5
CLK  (via drill 0.35)
  Top 0.254: v81.29,51.5 68.29,51.5 68.04,51.25 46.79,51.25 v46.54,51.5 | v46.79,27.75 52.04,27.75 53.04,26.75 58.29,26.75 58.29,28.25 59.29,29.25 60.79,29.25 60.79,30.75 61.79,31.75 63.29,31.75 64.54,33 XC95CPLD.2
  Bottom 0.254: v81.29,51.5 81.29,57 ARDUINO_NANO1.7 | 46.54,27.75 46.54,20.75 44.79,19 44.79,18 ANALOG.4 | 46.54,27.75 v46.54,51.5 | 46.54,27.75 v46.79,27.75
D0  (via drill 0.35)
  Top 0.254: 48.54,15.75 50.04,15.75 55.79,21.5 58.29,21.5 59.54,22.75 XC95CPLD.14 | v47.79,10 47.29,9.5 46.29,9.5 44.54,7.75 44.54,5.25 4A.1 | v33.29,73 35.29,73 36.04,73.75 44.29,73.75 44.29,78.5 4A1.1 | v30.04,20.25 30.54,19.75 32.79,19.75 36.79,15.75 48.54,15.75 | 48.54,15.75 v48.29,16
  Bottom 0.254: v48.29,16 47.79,15.5 v47.79,10 | v33.29,73 30.04,69.75 v30.04,20.25
D1  (via drill 0.35)
  Top 0.254: v59.54,10.5 v50.29,10.5 49.79,10.5 47.04,7.75 47.04,5.25 5A.1 | v46.79,73.75 46.79,78.5 5A1.1 | v45.29,40.5 47.29,38.5 v49.29,38.5
  Bottom 0.254: v59.54,10.5 59.54,15 XC95CPLD.18 | v46.79,73.75 45.79,72.75 45.79,53.25 45.29,52.75 v45.29,40.5 | v49.29,38.5 49.04,38.25 49.04,21 51.04,19 51.04,15 50.29,14.25 v50.29,10.5
D2  (via drill 0.35)
  Top 0.254: v52.79,16 57.79,16 59.54,17.75 XC95CPLD.19 | v51.04,9.5 51.04,5.25 49.54,5.25 6A.1 | v52.29,73.75 49.54,73.75 49.54,78.5 6A1.1
  Bottom 0.254: v51.04,9.5 51.04,14.25 v52.79,16 52.79,34.5 51.29,36 51.29,48.75 52.04,49.5 52.04,73.5 v52.29,73.75
D3  (via drill 0.35)
  Top 0.254: v66.29,21.5 v62.54,21.5 60.79,21.5 60.79,25.75 61.29,26.25 64.54,26.25 64.54,27.25 64.04,27.75 63.54,27.75 63.54,31 64.29,31.75 66.04,31.75 66.04,33.5 64.04,35.5 56.29,35.5 v55.54,36.25 | v58.04,9.75 58.04,5.25 57.29,5.25 9A.1 | v56.29,74.25 57.04,74.25 57.04,78.5 9A1.1
  Bottom 0.254: v66.29,21.5 66.29,19 67.29,18 XC95CPLD.25 | v62.54,21.5 60.04,19 58.29,19 58.29,11.75 58.04,11.5 v58.04,9.75 | v56.29,74.25 55.04,73 55.04,36.75 v55.54,36.25
D4  (via drill 0.35)
  Top 0.254: v64.29,13.75 68.54,13.75 69.79,15 XC95CPLD.26 | v62.04,10 59.79,7.75 59.79,5.25 10A.1 | v65.54,72.75 62.29,72.75 61.29,73.75 59.79,73.75 59.79,78.5 10A1.1
  Bottom 0.254: v62.04,10 62.04,13.75 v64.29,13.75 65.04,13.75 66.04,14.75 66.04,18.25 65.54,18.75 65.54,21.75 66.04,22.25 66.04,39 65.04,40 65.04,57.5 65.54,58 v65.54,72.75
D5  (via drill 0.35)
  Top 0.254: v66.79,11.75 66.29,11.25 60.29,11.25 59.54,12 56.54,12 v56.29,11.75 | v56.29,9.75 54.79,8.25 54.79,5.25 8A.1 | v61.54,72.25 60.54,72.25 59.29,73.5 54.79,73.5 54.79,78.5 8A1.1 | v61.54,68.25 65.04,64.75 v68.04,64.75
  Bottom 0.254: v66.79,11.75 66.79,14.5 67.29,15 XC95CPLD.24 67.54,15.25 68.54,16.25 68.54,33.5 67.79,34.25 67.79,39.75 67.54,40 67.54,57.5 67.79,57.75 67.79,64.5 v68.04,64.75 | v56.29,9.75 v56.29,11.75 | v61.54,68.25 v61.54,72.25
D6  (via drill 0.35)
  Top 0.254: v56.29,14.25 56.54,14 61.04,14 62.04,15 XC95CPLD.20 | v55.29,9.75 55.04,9.5 53.79,9.5 52.29,8 52.29,5.25 7A.1 | v50.79,77.25 52.04,78.5 7A1.1 | v50.54,72.25 49.79,71.5 v26.04,71.5 | v23.54,13.75 25.79,11.5 49.29,11.5 49.54,11.75 v55.29,11.75
  Bottom 0.254: v56.29,14.25 55.29,13.25 v55.29,11.75 v55.29,9.75 | v50.79,77.25 50.54,77 v50.54,72.25 | v26.04,71.5 21.54,67 21.54,38.25 20.54,37.25 20.54,16.75 v23.54,13.75
D7
  Top 0.254: 1A.1 36.79,5.25 35.54,6.5 6.04,6.5 5.29,7.25 5.29,32.25 3.04,32.25 1.29,34 1.29,78.5 25.54,78.5 27.54,80.5 35.04,80.5 36.79,78.75 1A1.1
GND  (via drill 0.35)
  Top 0.4: v95.79,19.5 84.29,19.5 84.29,14.75 IC1.1 | XC95CPLD.23 64.79,18 65.79,19 72.79,19 74.04,20.25 74.79,20.25 XC95CPLD.31 75.04,20.5 80.29,20.5 82.54,22.75 97.04,22.75 97.04,26 95.29,27.75 JP3.2 | v63.79,27 60.54,27 59.79,27.75 XC95CPLD.10 | v64.04,48.25 52.54,48.25 JP2.5 | v64.29,44.75 64.54,44.75 64.54,41.75 65.54,40.75 67.54,40.75 68.54,41.75 ARDUINO_NANO1.19 | v64.04,69.75 95.04,69.75 DIS0.1 | v53.79,27.5 v55.79,27.5 | IC3.1 28.04,50.75 28.04,48.5 IC3.2 | J2.6 27.04,17.75 29.29,17.75 J2.7 29.29,18 29.29,20.75 29.54,21 44.29,21 v46.04,19.25 | S1.1 3.29,79.75 9.54,79.75 S1.2 | v44.29,72.25 20.54,72.25 JP8.1 | v24.79,55 15.79,64 14.79,64 12.79,66 J3.7 | v46.04,14.5 v53.54,14.5
  Bottom 0.4: v95.79,19.5 97.04,20.75 97.04,26 95.29,27.75 JP3.2 | v63.79,27 64.54,26.25 64.54,18 XC95CPLD.23 | v64.29,44.75 64.04,45 v64.04,48.25 64.04,56.5 63.54,57 ARDUINO_NANO1.14 63.79,57 63.79,69.5 v64.04,69.75 | v55.79,27.5 55.79,26.75 58.54,26.75 59.54,27.75 XC95CPLD.10 | JP2.5 52.54,48.25 53.79,47 v53.79,27.5 53.54,27.25 v53.54,14.5 | 46.04,5.25 46.79,5.25 5B.1 | 46.04,5.25 44.54,5.25 4B.1 | IC3.2 28.04,48.25 28.04,45.75 IC3.3 27.79,45.5 26.04,43.75 26.04,35 27.79,33.25 IC3.8 27.79,33 27.04,32.25 27.04,18 J2.6 | v46.04,19.25 v46.04,14.5 46.04,5.25 | U$1.3 6.29,5.5 5.04,6.75 5.04,14.5 5.79,15.25 5.79,39 7.29,40.5 JC1.8 7.54,40.75 8.79,42 8.79,50 12.54,53.75 12.54,66 J3.7 12.79,66.25 12.79,68 | 5B1.1 46.79,78.75 44.54,78.75 4B1.1 44.29,78.5 v44.29,72.25 | 12.79,68 16.04,68 20.29,72.25 JP8.1 20.54,72.5 20.54,73.25 22.29,75 S2.4 | 12.79,68 12.79,75.25 | 12.79,75.25 12.79,76.5 9.79,79.5 S1.2 | v24.79,55 24.79,54 27.79,51 IC3.1 | 12.79,75.25 15.79,75.25 S2.3
  pour Bottom (isolate 0.2): 0,82.55 99.06,82.55 99.06,0 0,0
  pour Top (isolate 0.254): 0,82.55 99.06,82.55 99.06,0 0,0
GPX  (via drill 0.35)
  Top 0.254: v86.29,51 84.04,53.25 82.29,53.25 79.79,55.75 79.79,60.5 52.29,60.5 51.79,60 v29.29,60
  Bottom 0.254: v86.29,51 86.29,42 ARDUINO_NANO1.26 | v29.29,60 28.04,61.25 28.04,66 J3.1
INT  (via drill 0.35)
  Top 0.254: v71.04,48.5 v88.79,48.5 | v70.79,54.75 70.29,55.25 62.29,55.25 62.04,55 52.29,55 49.04,58.25 v29.29,58.25
  Bottom 0.254: v88.79,48.5 88.79,42 ARDUINO_NANO1.27 | v71.04,48.5 70.79,48.75 v70.79,54.75 | v29.29,58.25 25.54,62 25.54,66 J3.2
MISO  (via drill 0.35)
  Top 0.254: v97.04,45.25 94.54,47.75 79.04,47.75 78.04,46.75 59.54,46.75 v59.29,47 | v57.04,44.75 55.54,43.25 52.54,43.25 JP2.1 52.29,43.25 51.54,43.25 50.54,44.25 44.29,44.25 43.29,43.25 37.79,43.25 36.54,42 20.79,42 v18.79,44
  Bottom 0.254: v97.04,45.25 97.04,42.5 96.54,42 ARDUINO_NANO1.30 | v57.04,44.75 v59.29,47 | v18.79,44 18.79,65 17.79,66 J3.5
MOSI  (via drill 0.35)
  Top 0.254: v93.54,45.25 93.29,45.5 53.79,45.5 52.79,44.5 51.04,44.5 50.79,44.75 | 50.79,44.75 50.04,45.5 JP2.4 | v20.29,47.5 21.04,46.75 32.54,46.75 34.54,44.75 50.79,44.75
  Bottom 0.254: v93.54,45.25 93.54,42.25 93.79,42 ARDUINO_NANO1.29 | v20.29,47.5 20.29,66 J3.4
N$1
  Top 0.254: JP6.3 51.04,26.5 52.04,25.5 57.04,25.5 XC95CPLD.11
N$2
  Top 0.254: XC95CPLD.12 58.54,24.25 51.04,24.25 JP6.2
N$3
  Top 0.254: JP6.1 51.04,21.75 52.04,22.75 57.04,22.75 XC95CPLD.13
N$29  (via drill 0.35)
  Top 0.254: IC3.4 27.79,43.25 23.04,43.25 R1.2 21.29,44.75 v13.04,44.75
  Bottom 0.254: v13.04,44.75 10.54,47.25 JC1.1
N$32
  Top 0.254: IC3.5 27.79,40.75 23.04,40.75 R2.2 22.79,40.75 21.29,40.75 20.29,41.75 13.29,41.75 10.54,44.5 JC1.2
N$33
  Top 0.254: IC3.6 27.79,38.25 23.04,38.25 R3.2 22.79,38.25 21.79,39.25 13.04,39.25 10.54,41.75 JC1.3
N$34  (via drill 0.35)
  Top 0.254: R4.2 23.04,35.75 27.79,35.75 IC3.7 | v21.29,37 14.79,37 13.54,38.25 11.29,38.25 10.54,39 JC1.4
  Bottom 0.254: v21.29,37 22.79,35.5 R4.2
N$35  (via drill 0.35)
  Top 0.254: IC3.10 35.79,35.75 40.54,35.75 R5.2 | v39.04,44 38.79,44.25 27.29,44.25 25.54,46 7.54,46 JC1.6
  Bottom 0.254: v39.04,44 40.54,42.5 40.54,35.75 R5.2
N$36
  Top 0.254: IC3.9 34.04,31.5 16.29,31.5 15.29,30.5 R10.2
  Bottom 0.254: R10.2 15.04,30.5 10.54,35 10.54,36.25 JC1.5
N$37
  Top 0.254: S1.4 9.54,75.25 3.29,75.25 S1.3 3.29,75 3.29,32.75 14.04,32.75 14.79,32 29.79,32 34.29,36.5 38.79,36.5 | 38.79,36.5 38.79,36.25 39.79,36.25 40.04,36.5 43.54,36.5 44.29,35.75 R6.2 | 38.79,36.5 38.79,37.5 35.79,40.5 IC3.12
N$38
  Top 0.254: JP1.2 27.79,78.5 25.79,76.5 13.29,76.5 3.79,67 3.79,43.5 7.29,43.5 JC1.7
N$39
  Top 0.254: JC1.9 7.54,37.75 11.54,37.75 11.54,36.75 15.04,33.25 R9.2 15.29,33.25 18.54,33.25 22.29,37 34.54,37 35.54,38 IC3.11
NRST  (via drill 0.35)
  Top 0.254: v73.04,43 72.54,42.5 72.54,40.5 v72.79,40.5 | v73.04,35.25 71.04,33.25 71.04,31.75 69.54,31.75 68.54,30.75 68.54,29.25 65.79,29.25 64.79,30.25 XC95CPLD.3
  Bottom 0.254: v73.04,43 72.79,43.25 72.79,56.25 73.54,57 ARDUINO_NANO1.10 | v72.79,40.5 73.04,40.25 v73.04,35.25
PS2CLK  (via drill 0.35)
  Top 0.254: v73.54,53.5 70.29,53.5 69.79,53 67.54,53 67.29,52.75 49.54,52.75 48.54,53.75 v43.54,53.75 43.29,53.5 24.29,53.5 v19.54,48.75
  Bottom 0.254: v73.54,53.5 73.54,52.5 73.79,52.25 73.79,42 ARDUINO_NANO1.21 | v43.54,53.75 43.79,54 43.79,64.5 42.29,66 J5.4 | v19.54,48.75 19.54,32.5 15.54,28.5 15.54,12 9.04,5.5 U$1.5
PS2DATA  (via drill 0.35)
  Top 0.254: v83.79,47 83.04,46.25 v55.79,46.25 | v55.79,40.5 53.04,37.75 v42.54,37.75 | v40.79,14.5 13.29,14.5 6.54,7.75 U$1.1
  Bottom 0.254: v83.79,47 84.04,47.25 84.04,57 ARDUINO_NANO1.6 | v55.79,40.5 v55.79,46.25 | v42.54,37.75 42.29,37.5 42.29,18 ANALOG.3 42.04,17.75 42.04,15.75 v40.79,14.5
RES  (via drill 0.35)
  Top 0.254: v84.29,60.25 83.54,61 51.79,61 51.29,60.5 34.29,60.5 v32.54,62.25
  Bottom 0.254: v84.29,60.25 84.79,59.75 84.79,56.75 84.54,56.5 84.54,46.75 84.04,46.25 84.04,42 ARDUINO_NANO1.25 | v32.54,62.25 32.04,62.75 32.04,66 J5.8
SCK  (via drill 0.35)
  Top 0.254: v95.79,59.75 94.04,61.5 54.79,61.5 53.29,63 v43.04,63 18.29,63 15.29,66 J3.6 | v44.54,46.75 48.29,46.75 48.54,47 51.04,47 52.29,45.75 JP2.3
  Bottom 0.254: v95.79,59.75 95.79,57.75 96.29,57.25 ARDUINO_NANO1.1 | v44.54,46.75 43.54,47.75 43.54,52.75 42.79,53.5 42.79,55.25 43.04,55.5 v43.04,63
SCL  (via drill 0.35)
  Top 0.254: v76.29,64.75 95.04,64.75 DIS0.3 | 37.29,47.25 35.79,45.75 IC3.14 | 37.29,47.25 40.79,47.25 41.79,48.25 R7.1 | v36.79,26.25 47.54,26.25 47.54,22.5 49.54,20.5 49.54,18 ANALOG.6 | 37.29,47.25 29.79,47.25 | 29.79,47.25 26.79,47.25 25.79,48.25 20.04,48.25 19.79,48 18.79,48 18.79,52.5 5.29,66 J3.10 | v75.79,52.25 75.54,52 68.04,52 67.79,51.75 47.29,51.75 46.79,52.25 34.79,52.25 29.79,47.25
  Bottom 0.254: v76.29,64.75 76.29,57.25 ARDUINO_NANO1.9 76.04,57 75.79,56.75 v75.79,52.25 | v36.79,26.25 33.79,29.25 33.79,43.75 35.54,45.5 IC3.14
SDA  (via drill 0.35)
  Top 0.254: v78.79,62.25 95.04,62.25 DIS0.4 | IC3.15 35.79,48.25 39.29,48.25 R8.1 | v38.79,25.5 47.04,25.5 47.04,18 ANALOG.5 | J3.9 7.79,66 19.54,54.25 v34.04,54.25 34.29,54.5 43.79,54.5 44.04,54.25 48.79,54.25 49.79,53.25 67.04,53.25 67.29,53.5 69.54,53.5 70.04,54 71.04,54 71.29,54.25 75.79,54.25 78.54,57 ARDUINO_NANO1.8
  Bottom 0.254: v78.79,62.25 78.79,57.25 ARDUINO_NANO1.8 | v38.79,25.5 38.29,26 38.29,47.25 39.29,48.25 R8.1 | v34.04,54.25 33.79,54 33.79,50.25 35.54,48.5 IC3.15
SPARE1  (via drill 0.35)
  Top 0.254: v37.54,28.75 43.29,34.5 48.79,34.5 49.79,35.5 55.54,35.5 56.04,35 60.29,35 62.04,33.25 XC95CPLD.4 | v91.79,55 90.79,55 90.29,55.5 89.04,55.5 89.04,57 ARDUINO_NANO1.4 | v92.04,40.75 91.79,40.5 91.29,40.5 88.54,37.75 72.04,37.75 71.29,38.5 63.79,38.5 JP7.3
  Bottom 0.254: v37.54,28.75 37.54,18.25 37.29,18 ANALOG.1 | v91.79,55 92.29,54.5 92.29,42.5 92.54,42.25 92.54,41.25 v92.04,40.75 | XC95CPLD.4 62.29,33.25 63.54,34.5 63.54,38.25 JP7.3
SPARE2  (via drill 0.35)
  Top 0.254: v61.79,55.75 69.79,55.75 71.04,57 ARDUINO_NANO1.11
  Bottom 0.254: v61.79,55.75 61.79,42.5 62.04,42.25 62.04,39.25 61.29,38.5 JP7.2 61.04,38.25 61.04,31.5 62.04,30.5 XC95CPLD.5
SPARE3
  Bottom 0.254: JP7.1 58.79,38.25 59.54,37.5 59.54,33.25 XC95CPLD.6
SPARE4
  Top 0.254: JP5.3 51.04,34.25 54.79,30.5 57.04,30.5 XC95CPLD.7
SPARE5
  Top 0.254: JP5.2 51.04,31.75 53.54,29.25 58.54,29.25 59.54,30.25 XC95CPLD.8
SPARE6
  Top 0.254: JP5.1 51.04,29 51.79,28.25 56.79,28.25 57.04,28 XC95CPLD.9
SS  (via drill 0.35)
  Top 0.254: v91.04,55.75 90.04,56.75 90.04,58.5 v89.54,58.5 | v88.29,63.5 87.79,64 64.79,64 60.79,68 24.79,68 23.04,66.25 J3.3
  Bottom 0.254: v91.04,55.75 90.79,55.5 90.79,42.5 91.29,42 ARDUINO_NANO1.28 | v89.54,58.5 88.29,59.75 v88.29,63.5
TCK  (via drill 0.35)
  Top 0.254: v79.04,35 79.79,35 81.79,33 91.79,33 93.29,31.5 94.04,31.5 95.04,30.5 JP4.1 | v78.29,38.5 77.04,39.75 v70.29,39.75 | v69.29,23.5 66.54,20.75 61.79,20.75 60.04,19 58.29,19 57.29,18 XC95CPLD.17
  Bottom 0.254: v79.04,35 78.29,35.75 v78.29,38.5 | v70.29,39.75 70.29,34.25 71.04,33.5 71.04,29 69.29,27.25 v69.29,23.5
TDI  (via drill 0.35)
  Top 0.254: v92.04,34.75 94.29,34.75 95.04,35.5 JP4.3 | v91.54,32.25 90.79,31.5 75.54,31.5 75.29,31.75 74.54,31.75 73.54,30.75 73.54,29.25 69.29,29.25 65.54,25.5 v61.54,25.5
  Bottom 0.254: v92.04,34.75 91.54,34.25 v91.54,32.25 | v61.54,25.5 60.04,24 58.29,24 58.29,21.5 57.29,20.5 XC95CPLD.15
TDO
  Top 0.254: JP4.2 95.29,33 96.29,32 96.79,32 97.54,31.25 97.54,22.25 82.79,22.25 79.54,19 73.54,19 72.54,18 XC95CPLD.30
TMS  (via drill 0.35)
  Top 0.254: v62.54,24 66.29,24 68.79,26.5 73.54,26.5 73.54,28.25 74.54,29.25 75.29,29.25 75.79,29.75 89.29,29.75 89.79,29.25 97.04,29.25 97.04,31 96.54,31.5 96.04,31.5 95.54,32 93.54,32 93.54,33.5 94.29,34.25 97.04,34.25 97.04,36.25 95.29,38 JP4.4
  Bottom 0.254: v62.54,24 59.79,21.25 59.79,20.5 XC95CPLD.16
VCC  (via drill 0.35)
  Top 0.4: U$1.4 6.54,12.5 9.79,15.75 14.54,15.75 16.54,17.75 J2.2 | R6.1 44.29,28 40.79,28 R5.1 40.54,28 25.29,28 23.04,30.25 R10.1 | R8.2 39.54,56 41.79,56 R7.2 | v44.54,43.5 49.54,43.5 49.79,43.25 JP2.2 | v93.54,17.25 91.29,17.25 88.79,14.75 IC1.3 | v68.54,50.75 v42.79,50.75 35.79,50.75 IC3.16 | v69.29,69 93.54,69 95.04,67.5 DIS0.2 | JP8.2 17.79,72.5 19.54,74.25 20.79,74.25 21.04,74 25.79,74 30.29,78.5 JP1.1
  Bottom 0.4: R1.1 15.29,43 15.29,40.75 R2.1 15.29,40.5 15.29,38.25 R3.1 15.29,38 15.29,35.75 R4.1 15.29,35.5 16.29,34.5 16.29,30 6.54,20.25 6.54,12.5 U$1.4 | 43.41,44.62 43.04,45 43.04,50.75 | 43.41,44.62 v44.54,43.5 | 43.04,50.75 43.04,52.5 42.04,53.5 42.04,55.75 R7.2 | R6.1 44.29,28 43.29,29 43.29,44.5 43.41,44.62 | R9.1 22.79,33 22.79,30.5 R10.1 23.04,30.25 23.04,19.25 24.29,18 J2.5 24.54,17.75 24.54,10 | 24.54,10 24.54,5.25 36.79,5.25 1B.1 | 24.54,10 16.79,17.75 J2.2 | v93.54,17.25 93.29,17.5 93.29,39.75 95.04,41.5 95.04,60.75 94.04,61.75 94.04,66.25 95.04,67.25 DIS0.2 | 35.79,78.75 36.79,78.75 1B1.1 | 35.79,78.75 30.7,78.75 JP1.1 | v68.54,50.75 68.54,57 ARDUINO_NANO1.12 68.79,57.25 68.79,68.5 v69.29,69 | 35.79,78.75 35.79,51 IC3.16 | v42.79,50.75 43.04,50.75

## Text on the board
tNames: 5V | GND | TMS | TDI | TDO | TCK | GND | VREF | ZX81 KBD+ / (C) 2023 Alejandro Valero / (Wilco2009)